# Altium PCB Core.PcbDoc (part 4 of 4)
Units mil, origin at the board's own origin, x right, y up, seen from the top; angles counter-clockwise.
Board outline 3055.22 x 2665.85 mil, 4 copper layers (Top Layer, Layer 1, Layer 2, Bottom Layer), stack 61.583 mil thick; 290 components, 231 nets, 1079 pads, 581 vias.
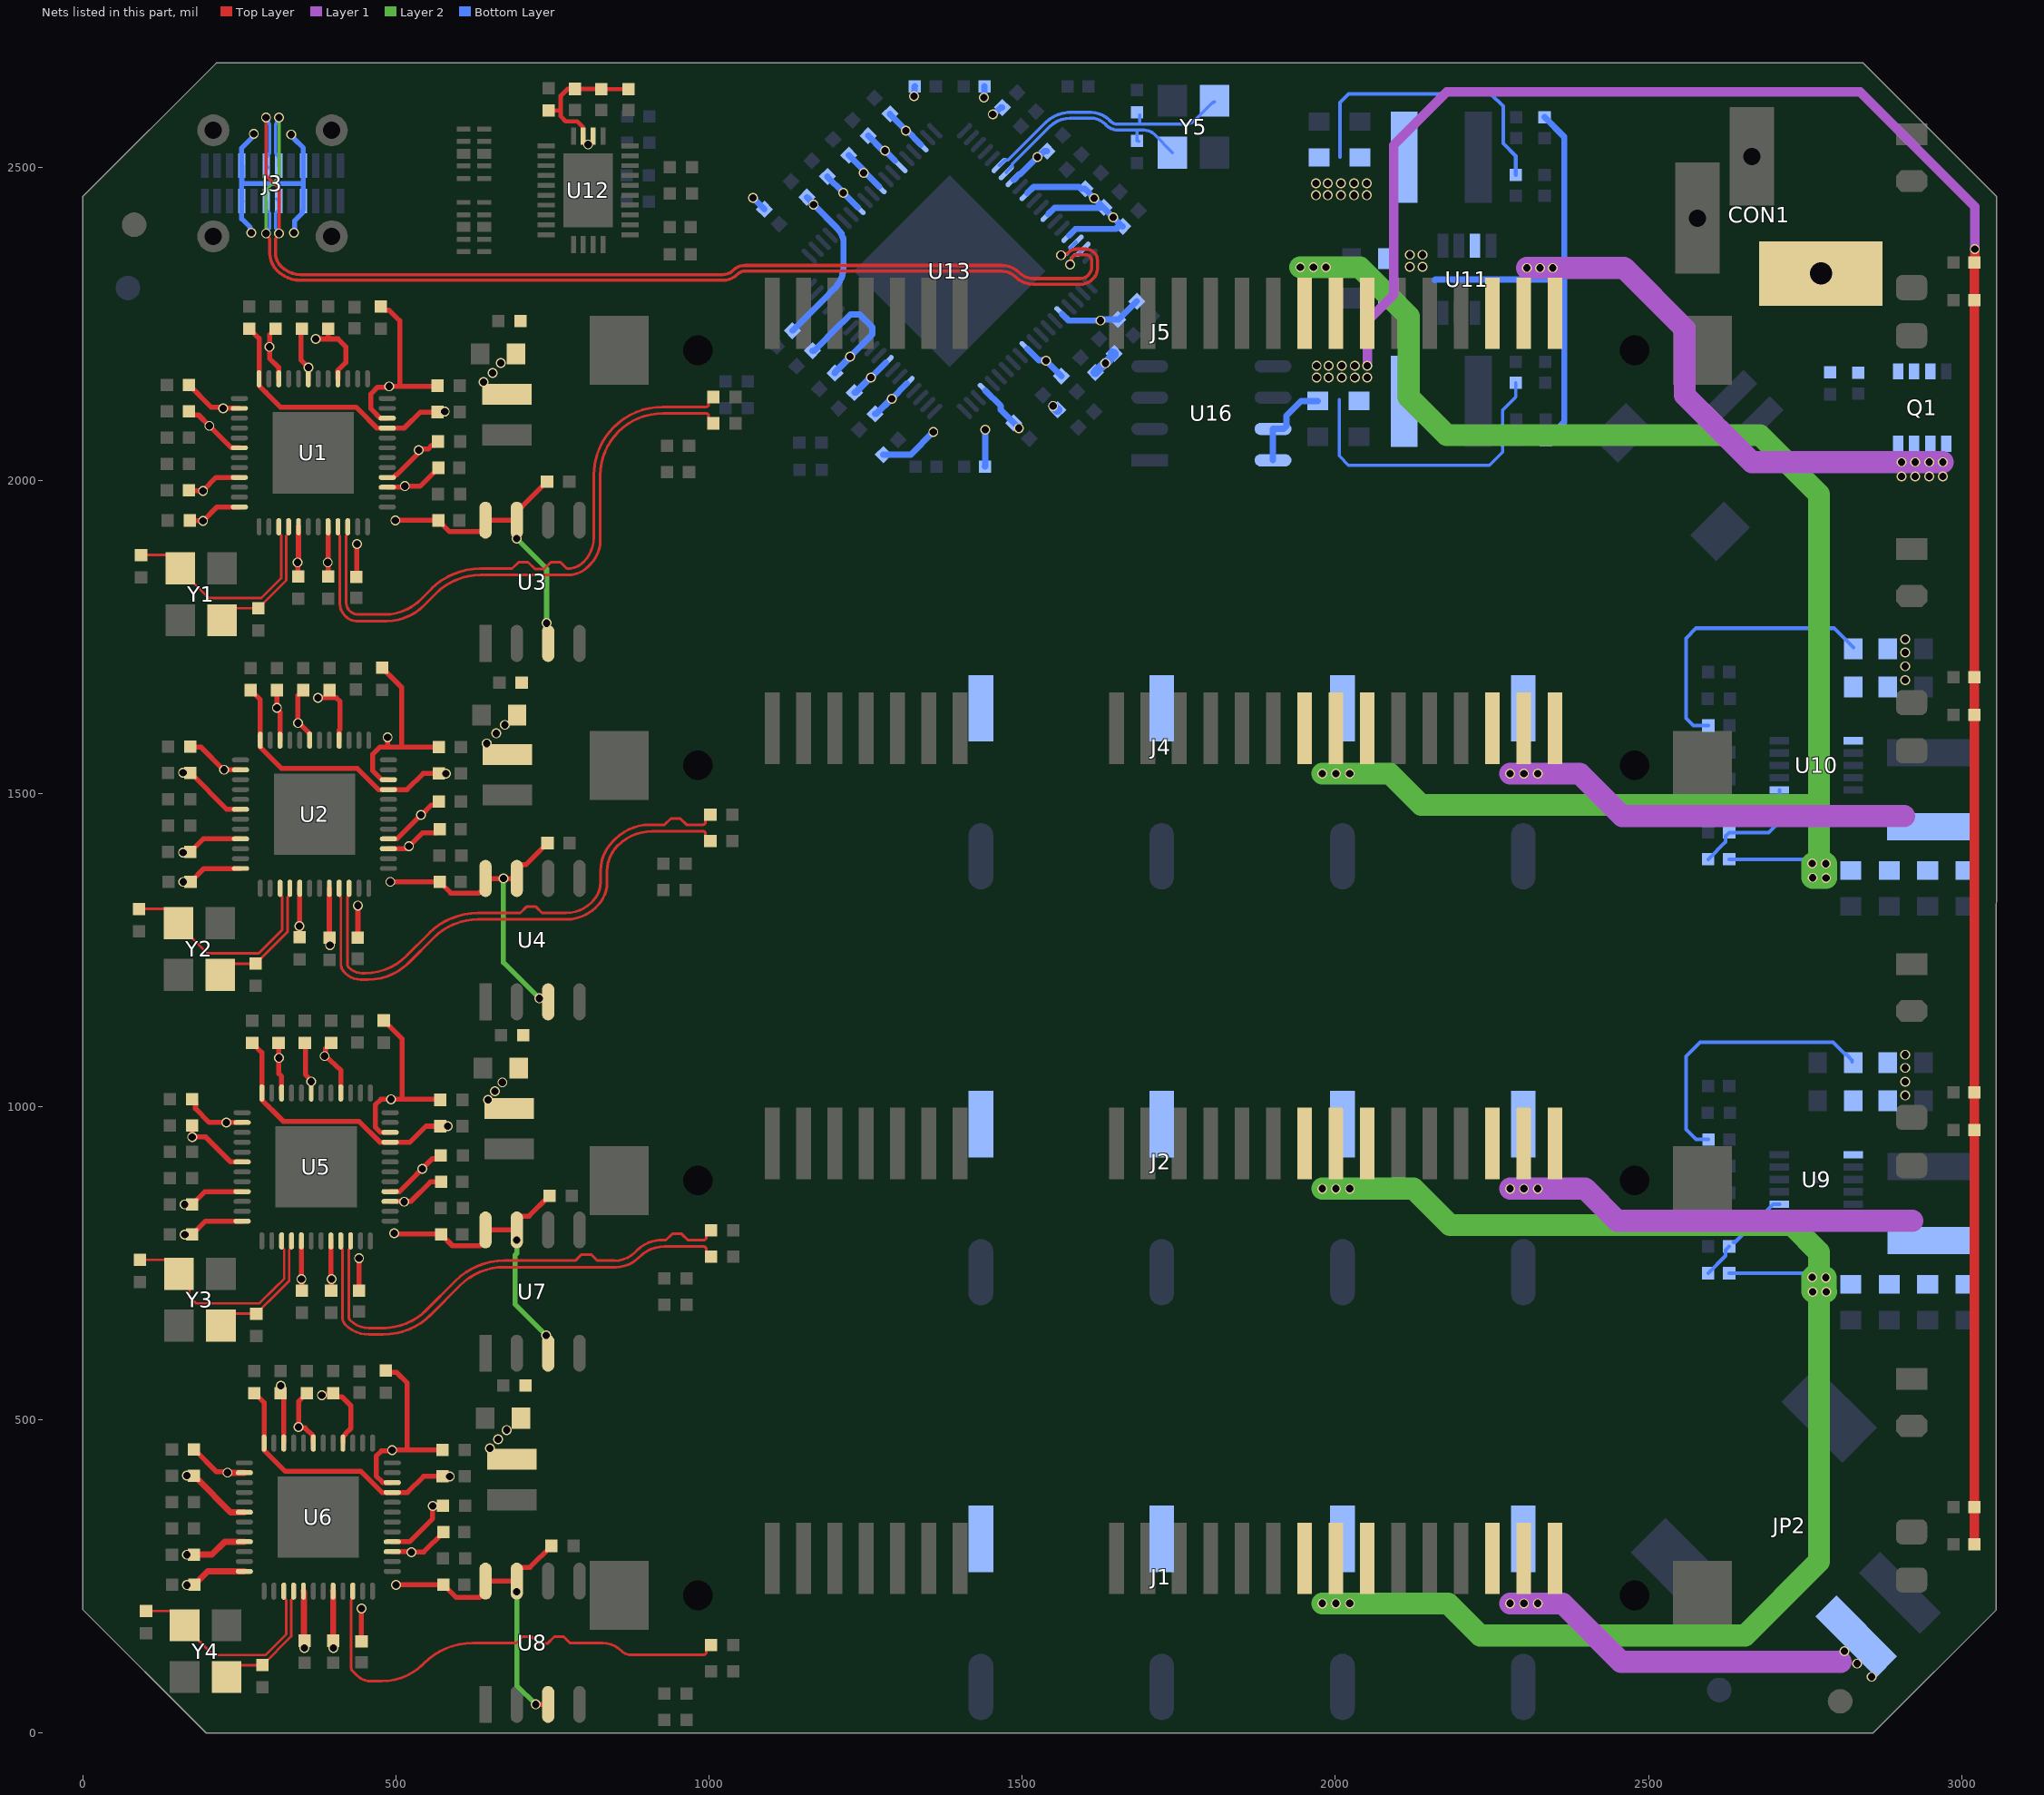
[diagram p6: the nets of this part, all layers, seen from the top]

## Via types
v1: diameter 15.75, hole 11.81, Top Layer to Bottom Layer, tented both sides, 581 vias

## Nets (pads, with @x,y where several pads share a name; then routed paths per layer and width w, separated by ;. In a path a pad name is that pad's centre, name@x,y a point inside that pad or via, vN(x,y) a via of type N, cw(c..) or ccw(c..) an arc to the next point about the centre after c; other vN are vias at no path point) (continued)
TX1_P: C1.2 U6.34 | length 758.8
  Top Layer w4.29: 430.77,99.12 cw(c436.58,104.9) 428.39,104.9 428.39,211.42 cw(c433.05,211.42) 429.75,214.71 ccw(c426.46,218.01) 431.12,218.01 U6.34@431.12,226.89 ; 430.79,99.1 437.64,92.25 ccw(c459.98,114.59) 459.98,83 477.18,83 ccw(c477.18,176.71) 543.42,110.42 ; 540.43,107.43 543.42,110.42 ; C1.2@997.55,135.27 ccw(c1002.33,130.51) 995.59,130.51 995.59,129.49 cw(c991.3,129.49) 994.33,126.46 cw(c991.3,129.49) 991.3,125.2 875.5,125.2 cw(c875.5,147.29) 859.89,131.66 ccw(c830.12,101.92) 830.12,144 801.46,144 777.86,144 767.86,154 752.86,154 742.43,143.57 727.43,143.57 717,154 702,154 692,144 677,144 622.65,144 ccw(c622.65,33.8) 544.82,111.82 ccw(c622.65,33.8) 544.72,111.72 543.42,110.42 ; C1.2@997.56,135.28 C1.2@1003.28,141
TX2_N: C4.2 U5.33 | length 778.1
  Top Layer w4.29: U5.33@411.91,785.89 411.91,775.08 414.64,772.35 414.64,663.78 ccw(c431.52,663.78) 419.56,651.87 ; 419.59,651.84 419.69,651.73 ccw(c456.41,688.45) 456.41,636.53 479.72,636.53 ccw(c479.72,743.62) 555.45,667.89 602.26,714.71 cw(c672.97,644) 672.97,744 851.15,744 ccw(c851.15,795.67) 887.67,759.12 ; 887.69,759.13 888.98,760.43 cw(c928.64,720.77) 928.64,776.85 991.3,776.86 cw(c991.3,772.56) 994.33,775.6 cw(c991.3,772.56) 995.59,772.56 995.59,771.52 ccw(c1002.4,771.52) 997.58,766.71 C4.2@1003.28,761
TX2_P: C2.2 U5.34 | length 783
  Top Layer w4.29: 426.88,659.1 cw(c431.67,663.84) 424.93,663.84 424.93,772.35 427.66,775.08 U5.34@427.66,785.89 ; 426.93,659.05 ccw(c456.49,688.66) 456.49,646.82 479.57,646.82 ; 483.83,646.82 479.57,646.82 ; C2.2@1003.28,803 997.58,797.29 ccw(c1002.4,792.48) 995.59,792.48 995.59,791.44 cw(c991.3,791.44) 994.33,788.4 cw(c991.3,791.44) 991.3,787.14 966.04,787.14 956.04,797.14 941.04,797.14 931.04,787.14 924.38,787.14 ccw(c924.38,731.06) 916.07,786.53 ccw(c924.38,731.06) 884.72,770.72 881.7,767.7 cw(c849.32,800.09) 849.32,754.29 841,754.29 821.5,754.29 811.5,764.29 796.5,764.29 786.5,754.29 749,754.29 672.94,754.29 ccw(c672.94,644.09) 595.11,722.11 ccw(c672.94,644.09) 595.01,722.01 548.28,675.28 cw(c479.57,743.98) 479.57,646.82
TX3_N: C11.2 U2.33 | length 849.3
  Top Layer w4.29: U2.33@409.37,1348.89 409.37,1340.01 ccw(c414.03,1340.01) 410.73,1336.71 cw(c407.44,1333.42) 412.1,1333.42 412.1,1227.86 ccw(c430.49,1227.86) 417.45,1214.89 ccw(c430.49,1227.86) 417.49,1214.85 419.17,1213.17 ccw(c443.72,1237.72) 443.72,1203 455,1203 ccw(c455,1296.07) 520.81,1230.26 560.26,1269.71 cw(c630.97,1199) 630.97,1299 771.79,1299 ccw(c771.79,1366.23) 819.33,1318.69 821.66,1321.02 ccw(c784.33,1358.35) 837.12,1358.35 837.12,1376.05 cw(c894.91,1376.05) 854.05,1416.9 cw(c909.46,1361.49) 854.09,1416.94 cw(c909.46,1361.49) 909.46,1439.86 990.01,1439.86 cw(c990.01,1435.56) 993.05,1438.6 cw(c990.01,1435.56) 994.3,1435.56 994.3,1434.52 ccw(c1001.12,1434.52) 996.29,1429.71 C11.2@1002,1424
TX3_P: C9.2 U2.34 | length 849.5
  Top Layer w4.29: 424.77,1222.12 cw(c430.58,1227.9) 422.39,1227.9 422.39,1333.42 cw(c427.05,1333.42) 423.75,1336.7 ccw(c420.46,1340.01) 425.12,1340.01 U2.34@425.12,1348.89 ; 424.79,1222.1 424.86,1222.04 ccw(c446.01,1243.25) 446.01,1213.29 450.74,1213.29 ccw(c450.74,1306.36) 516.53,1240.53 553.01,1277.01 cw(c630.94,1199.09) 553.11,1277.11 cw(c630.94,1199.09) 630.94,1309.29 663,1309.29 698.37,1309.29 708.37,1319.29 723.37,1319.29 733.37,1309.29 748.37,1309.29 771.75,1309.29 ccw(c771.75,1366.34) 812.09,1326 814.34,1328.25 ccw(c784.17,1358.41) 826.83,1358.41 826.83,1376.09 cw(c894.81,1376.09) 826.83,1376.2 cw(c894.81,1376.09) 846.68,1424.09 cw(c894.81,1376.09) 846.74,1424.15 849.79,1427.19 cw(c905.2,1371.78) 849.82,1427.23 cw(c905.2,1371.78) 905.2,1450.14 929,1450.14 939,1460.14 954,1460.14 964,1450.14 979,1450.14 990.01,1450.14 ccw(c990.01,1454.44) 993.05,1451.4 ccw(c990.01,1454.44) 994.3,1454.44 994.3,1455.48 cw(c1001.12,1455.48) 996.29,1460.29 C9.2@1002,1466
TX4_N: C12.2 U1.33 | length 959.6
  Top Layer w4.29: U1.33@407.37,1925.89 407.37,1917.01 ccw(c412.03,1917.01) 408.73,1913.71 410.35,1912.1 410.35,1803.39 ccw(c437.41,1803.39) 421.51,1781.49 ccw(c436.06,1796.04) 436.06,1775.46 485.72,1775.46 ccw(c485.72,1858.26) 544.22,1799.67 ccw(c485.72,1858.26) 544.26,1799.71 563.97,1819.42 cw(c634.68,1748.71) 634.68,1848.71 774.14,1848.71 ccw(c774.14,1894.86) 806.78,1862.23 809.82,1865.27 ccw(c769.95,1905.07) 826.29,1905.07 826.29,2007.97 cw(c924.71,2007.97) 855.12,2077.57 cw(c925.83,2006.86) 925.83,2106.86 995.01,2106.86 cw(c995.01,2102.56) 998.05,2105.6 cw(c995.01,2102.56) 999.3,2102.56 999.3,2101.52 ccw(c1006.12,2101.52) 1001.29,2096.71 C12.2@1007,2091
TX4_P: C10.2 U1.34 | length 959.2
  Top Layer w4.29: U1.34@423.12,1925.89 423.12,1917.01 cw(c418.46,1917.01) 421.75,1913.71 ccw(c424.45,1911.01) 420.64,1911.01 420.64,1804.19 ccw(c438.19,1804.19) 425.78,1791.78 ccw(c440.33,1806.33) 440.33,1785.75 481.45,1785.75 ccw(c481.45,1868.55) 539.96,1809.96 ccw(c481.45,1868.55) 540,1810 556.72,1826.72 cw(c634.65,1748.8) 556.82,1826.82 cw(c634.65,1748.8) 634.37,1859 cw(c634.66,1748.8) 634.65,1859 685.53,1859 695.89,1869.37 710.89,1869.37 721.26,1859 721.69,1858.57 736.69,1858.57 737.12,1859 747.49,1869.37 762.49,1869.37 772.86,1859 774.1,1859 ccw(c774.1,1894.96) 788.91,1862.19 ccw(c774.1,1894.96) 799.53,1869.53 ccw(c759.66,1909.34) 816,1909.34 816,2008.01 cw(c924.62,2008.01) 816,2008.16 cw(c924.62,2008.01) 847.75,2084.75 cw(c924.62,2008.01) 847.81,2084.81 848,2085 cw(c925.6,2007.4) 925.6,2117.14 995.01,2117.14 ccw(c995.01,2121.44) 998.05,2118.4 ccw(c995.01,2121.44) 999.3,2121.44 999.3,2122.48 cw(c1006.12,2122.48) 1001.29,2127.29 C10.2@1007,2133
USBD_N: J3.A7 J3.B7 U13.56 | length 1811.7
  Top Layer w5.15: v1(292.63,2579) 292.63,2486.37 313.38,2465.62 v1@313.38,2394.38 ; v1(313.38,2394) 313.38,2391.48 307.58,2385.68 307.58,2363 ccw(c337.95,2363) 316.48,2341.52 ccw(c347.99,2373.04) 347.99,2328.47 1022.18,2328.47 ccw(c1022.18,2351.82) 1038.69,2335.31 cw(c1057.26,2316.74) 1057.26,2343 1467.15,2343 cw(c1467.15,2302.31) 1495.92,2331.08 ; 1495.93,2331.07 ccw(c1517.85,2353.01) 1517.85,2322 1592.93,2322 ccw(c1592.93,2339.07) 1605,2327 ccw(c1590.84,2341.16) 1610.87,2341.16 1610.87,2350.91 ccw(c1601.82,2350.91) 1608.22,2357.31 ccw(c1602,2351.1) 1607.62,2357.85 ccw(c1602,2351.1) 1602,2359.89 1587.09,2359.89 ccw(c1587.09,2350.92) 1580.75,2357.26 ccw(c1587.09,2350.92) 1580.32,2356.8 ccw(c1587.09,2350.92) 1578.12,2350.92 1578.12,2348.95 cw(c1572.05,2348.95) v1(1576.34,2344.66) v1@1574.57,2342.88
  Bottom Layer w5.15: v1(292.63,2579) ccw(c298.7,2579) 294.41,2574.7 cw(c284.7,2565) 298.42,2565 298.43,2525.11 cw(c289.44,2525.11) 295.8,2518.77 ccw(c302.15,2512.4) 293.16,2512.4 J3.A7@293.16,2502.34 J3.A7@296.43,2499.08 ; J3.B7@309.52,2448.99 J3.B7@312.85,2445.66 312.85,2431.88 307.58,2426.61 307.58,2402.32 313.38,2396.52 v1(313.38,2394) ; v1(1576.34,2344.66) 1578.12,2346.43 1578.12,2354.64 1583.41,2359.92 1588.11,2359.92 U13.56@1596.98,2368.79
USBD_P: J3.A6 J3.B6 U13.55 | length 1853.5
  Top Layer w5.15: v1(292.63,2394) 292.63,2391.48 298.43,2385.68 298.43,2362.96 ccw(c337.85,2362.96) 309.93,2335.13 ccw(c337.85,2362.96) 309.98,2335.08 310.08,2334.98 ccw(c347.99,2373.04) 347.89,2319.32 ccw(c347.99,2373.04) 347.99,2319.32 1022.27,2319.32 ccw(c1022.27,2351.61) 1045.1,2328.78 cw(c1057.34,2316.54) 1057.34,2333.85 1467.03,2333.85 cw(c1467.03,2302.03) 1489.53,2324.53 ; 1489.55,2324.51 ccw(c1517.73,2352.73) 1517.73,2312.85 1593,2312.85 ccw(c1593,2338.9) 1611.42,2320.48 1614.15,2323.21 ; v1@1559.89,2357.55 v1(1561.67,2359.33) cw(c1565.97,2355.03) 1565.97,2361.11 1566.05,2361.11 ccw(c1566.05,2374.64) 1575.62,2365.07 cw(c1585.19,2355.5) 1585.19,2369.04 1602.06,2369.04 cw(c1602.06,2351.25) 1614.64,2363.83 1615.21,2363.26 cw(c1603.6,2351.65) 1620.02,2351.65 1620.02,2337.37 cw(c1599.99,2337.37) 1614.17,2323.23
  Layer 2 w5.15: v1(292.63,2394) 292.63,2463.63 313.37,2484.37 v1(313.37,2579)
  Bottom Layer w5.15: v1(292.63,2394) 292.63,2396.52 298.43,2402.32 298.43,2426.61 293.16,2431.88 J3.B6@293.16,2445.66 ; J3.A6@312.84,2502.34 312.84,2512.4 ccw(c303.85,2512.4) 310.22,2518.75 cw(c316.56,2525.11) 307.57,2525.11 307.57,2565 cw(c321.3,2565) 311.58,2574.69 ccw(c307.3,2579) v1(313.37,2579) ; v1(1561.67,2359.33) 1563.45,2361.11 1571.65,2361.11 1576.94,2366.39 1576.94,2371.09 U13.55@1585.81,2379.96
VBUS: C41.2 C42.2 C46.2 C47.2 C83.2 C84.2 C88.2 C89.2 C123.2 C124.2 C129.2 J3.A4 J3.A9 J3.B4 J3.B9 R30.1 R31.1 R38.1 R39.1 R45.2 U1.12 U1.45 U2.12 U2.45 U5.12 U5.45 U6.12 U6.45 U11.7 U12.26 U12.27 | length 3189.3
  Top Layer w2: C83.2@570.83,969 v1(582.54,969)
  Top Layer w7: C129.2@744,2590.28 763.13,2590.28 ; 763,2608 763,2613.73 774,2624.73 R45.2@786,2624.73 786.13,2624.6 R39.1@826.46,2624.6 ; 763.13,2608 763.13,2590.28 ; U12.27@799,2539.9 801.27,2537.63 805.21,2537.63 v1(806.88,2535.96) ; U12.27@799.12,2549.62 798.68,2550.06 798.68,2563.55 789.23,2573 771,2573 763.13,2580.87 763.13,2590.28 ; R39.1@823,2621 826.46,2624.46 R39.1@828,2624.46 R38.1@870.54,2624.46 ; R38.1@871,2624.46 R38.1@870.54,2624.46 ; R38.1@872,2623 R38.1@870.54,2624.46
  Top Layer w8: C41.2@266,2242 281.39,2226.62 U1.12@281.39,2162.11 281.39,2151.13 292.19,2140.33 292.35,2140.33 315.72,2116.96 436.27,2116.96 440.72,2112.51 440.78,2112.51 469.92,2083.37 U1.45@486.11,2083.37 513.37,2083.37 539,2109 C42.2@566.28,2109 566.63,2109.35 577.65,2109.35 v1(578,2109.7) ; C46.2@268,1665 283.39,1649.62 U2.12@283.39,1585.11 283.39,1573.93 317.35,1539.96 438.27,1539.96 471.87,1506.37 U2.45@488.11,1506.37 517.62,1506.37 543.25,1532 C47.2@568.28,1532 v1(580,1532) ; C84.2@270.54,1102 285.93,1086.62 U5.12@285.93,1022.11 285.93,1011.13 296.71,1000.35 ; C88.2@271.86,540.86 C88.2@274,543 289.39,527.62 U6.12@289.39,463.11 289.39,452.06 323.48,417.96 444.27,417.96 477.8,384.43 494.05,384.43 U6.45@494.11,384.37 518.37,384.37 544,410 C89.2@574.28,410 v1(586,410) ; 296.75,1000.35 304.87,992.23 ; 304.87,992.19 320.1,976.96 440.82,976.96 474.35,943.43 490.59,943.43 U5.45@490.65,943.37 522.42,943.37 548.05,969 C83.2@570.83,969
  Bottom Layer w8: v1(269,2395) 267.52,2396.48 267.52,2403.73 253.79,2417.46 J3.B4@253.79,2445.66 J3.B4@253.79,2445.66 253.79,2445.76 J3.A9@253.79,2502.34 ; v1(273,2553) 271.52,2551.52 271.52,2548.27 253.79,2530.54 J3.A9@253.79,2502.34 ; v1(333,2552) 333,2549.9 337.48,2545.42 337.48,2545.27 352.21,2530.54 J3.A4@352.21,2502.34 J3.B9@352.21,2445.66 352.21,2431.88 350.3,2429.97 350.3,2426.4 338.48,2414.58 338.48,2396.48 v1(337,2395) ; 351.53,2473.99 254.04,2473.99 253.84,2474.19 J3.A9@253.79,2502.34 J3.A9@253.79,2502.34
  Bottom Layer w10: 2159,2320 2159.63,2320.63 2365.5,2320.63 ; R30.1@2334,2579.73 2365.5,2548.23 2365.5,2320.63 ; R31.1@2336,2063.54 2365.5,2093.04 2365.5,2320.63
  other v1: 2119,2341 2139,2341 2119,2360 2139,2360
VCC1V0: C125.2 C126.2 C149.2 C150.2 C151.2 C152.2 C153.2 C154.2 C155.2 C156.2 C157.2 C158.2 C159.2 C160.2 L7.1 R34.1 U13.5 U13.8 U13.11 U13.14 U13.27 U13.30 U13.33 U13.36 U13.48 U13.51 U13.54 U13.67 | length 1658
  Bottom Layer w6: 2007.25,2516.19 2007.25,2603.25 2021,2617 2248,2617 2268,2597 2268,2537.68 2288,2517.68 R34.1@2288,2487.46
  Bottom Layer w10: C153.2@1165,2207 1167.9,2207 1208.72,2247.81 U13.14@1215.57,2254.66 1225.68,2264.78 1240.45,2264.78 1260.76,2244.47 1260.76,2232.96 U13.11@1249.01,2221.22 v1(1225.01,2197.21) ; C152.2@1189,2485 1189,2484.5 1214,2459.5 v1(1214,2459) 1214.23,2459 1237.61,2435.61 U13.27@1237.84,2435.61 ; C154.2@1200.5,2171 C154.2@1201,2171 C154.2@1201,2172.1 ; C150.2@1223,2519 1245.9,2496.1 1245.9,2492.1 v1(1247,2491) ; C149.2@1232,2140 C149.2@1233.27,2140 ; v1@1248.1,2492.1 U13.30@1271.22,2468.99 ; C151.2@1254,2550 1276.9,2527.1 1279.9,2527.1 v1(1281,2526) ; C157.2@1265,2106 C157.2@1266.15,2106 ; v1(1281,2526) U13.33@1297.04,2510.01 ; U13.8@1282.39,2187.84 v1(1258.47,2163.92) ; C158.2@1289,2585 1289,2584 1314,2559 v1(1314,2558) ; v1@1313.96,2559.96 1338.04,2535.89 U13.36@1338.04,2535.81 ; U13.5@1315.76,2154.47 v1(1291.53,2130.23) ; U13.67@1507.89,2210.11 1526.48,2191.52 1537.48,2191.52 C156.2@1562.47,2166.53 ; U13.48@1507.89,2457.89 1518.07,2468.07 1591.03,2468.07 1593.62,2465.47 1600,2465.47 1615,2450.47 v1(1615,2450) C155.2@1629.53,2435.47 ; U13.51@1541.26,2424.51 1551.75,2435 1623.15,2435 1623.62,2435.47 C155.2@1629.53,2435.47 ; U13.54@1574.71,2391.06 1584.89,2401.25 1649.4,2401.25 C159.2@1653.62,2405.47 ; C159.2@1660.47,2405.47 1660,2405.47 1645.47,2420 v1(1645,2420) C155.2@1629.53,2435.47 ; C154.2@1201,2172.1 1201,2173.2 v1(1225.01,2197.21) ; C154.2@1201,2172.1 1225.01,2196.11 v1(1225.01,2197.21) ; C149.2@1233.27,2140 1234.55,2140 v1(1258.47,2163.92) ; C149.2@1233.27,2140 1257.19,2163.92 v1(1258.47,2163.92) ; C157.2@1266.15,2106 1267.3,2106 v1(1291.53,2130.23) ; C157.2@1266.15,2106 1290.38,2130.23 v1(1291.53,2130.23)
  other v1: 1538,2191 1969,2455 1988,2455 2009,2455 2030,2455 2050,2455 1969,2474 1988,2474 2009,2474 2030,2474 2050,2474
VCC1V2-A: C19.2 C20.2 C25.2 C26.2 C27.2 C28.2 C29.2 C30.2 C31.2 C32.2 L1.2 U1.4 U1.10 U1.18 U1.21 U1.24 U1.29 U1.32 U1.40 | length 755.6
  Top Layer w8: C28.2@169.72,1984 170.22,1983.5 191.5,1983.5 v1(192,1983) ; C30.2@169.72,2110 175.4,2104.31 184.69,2104.31 v1(202,2087) 237.13,2051.87 U1.18@249.89,2051.87 ; C25.2@170.72,1936 171.22,1935.5 191.5,1935.5 v1(192,1935) 214.39,1957.39 U1.24@249.89,1957.39 ; v1@192,1984 212.63,2004.63 U1.21@249.89,2004.63 ; C29.2@308,2242 298.26,2232.26 v1(298.26,2213) 298.26,2194.74 312.88,2180.12 U1.10@312.88,2162.11 ; v1(343,1869) 343.5,1868.5 343.5,1848.22 C26.2@344,1847.72 ; v1@344.38,1868 U1.29@344.38,1925.89 ; v1(372.09,2225.65) 392,2225.65 ; v1(391,1869) 391.5,1868.5 391.5,1847.22 C31.2@392,1846.72 ; v1@391.62,1868 U1.32@391.62,1925.89 ; C27.2@392,2242 392,2225.65 ; U1.4@407.37,2162.11 407.37,2175.37 420,2188 420,2213.18 407.53,2225.65 392,2225.65 ; U1.40@495.89,2004.69 499.64,2008.44 500.9,2008.44 534.74,2042.28 534.74,2046.86 v1(536.22,2048.35) ; v1@536,2049 536.83,2049.83 551.23,2049.83 557.56,2056.16 561.16,2056.16 C32.2@567,2062
  other v1: 639.87,2157.08 654.38,2171.18 667.52,2187.12
VCC1V2-B: C21.2 C22.2 C33.2 C34.2 C35.2 C36.2 C37.2 C38.2 C39.2 C40.2 L2.2 U2.4 U2.10 U2.18 U2.21 U2.24 U2.29 U2.32 U2.40 | length 762.8
  Top Layer w8: v1(160,1406) 160.5,1406.5 171.22,1406.5 C36.2@171.72,1407 192.35,1427.63 U2.21@251.89,1427.63 ; v1(160.28,1359) C33.2@172,1359 193.39,1380.39 U2.24@251.89,1380.39 ; C35.2@171.72,1533 229.84,1474.87 U2.18@251.89,1474.87 ; C34.2@310,1665 310,1634.9 314.88,1630.02 U2.10@314.88,1585.11 ; C40.2@346,1270.72 345.91,1270.81 345.91,1288.15 v1(345.82,1288.24) 346.31,1288.74 346.31,1348.83 U2.29@346.38,1348.89 ; v1(375.54,1652.94) 394,1652.94 ; C38.2@393.62,1270.09 U2.32@393.62,1348.89 ; C38.2@394,1269.72 394.32,1269.39 394.32,1258.32 v1(394.65,1258) ; C39.2@394,1665 394,1652.94 ; U2.4@409.37,1585.11 409.37,1601.1 410.8,1602.53 410.8,1646.82 404.68,1652.94 394,1652.94 ; U2.40@497.89,1427.69 501.65,1427.69 v1(539.95,1466) ; v1@541,1466 556.16,1481.16 562.44,1481.16 C37.2@568.28,1487
  other v1: 160,1533 645,1580 660,1596 673.86,1609.67 310,1637
VCC1V2-C: C61.2 C62.2 C67.2 C68.2 C69.2 C70.2 C71.2 C72.2 C73.2 C74.2 L3.2 U5.4 U5.10 U5.18 U5.21 U5.24 U5.29 U5.32 U5.40 | length 768
  Top Layer w8: v1(162.54,844) C67.2@174.26,844 194.89,864.63 U5.21@254.43,864.63 ; v1(162.83,796) C73.2@174.54,796 195.93,817.39 U5.24@254.43,817.39 ; C69.2@174.26,970 174.63,969.63 v1(174.63,951.72) ; v1@174.63,947.63 v1(174.63,951.72) ; U5.18@254.43,911.87 236.13,911.87 196.28,951.72 v1(174.63,951.72) ; C71.2@312.54,1102 312.77,1101.77 312.77,1078.23 v1(313,1078) 313,1053 317.43,1048.57 U5.10@317.43,1022.11 ; U5.29@348.92,785.89 348.98,785.83 v1@348.98,723.91 ; v1(349,725) 349.54,724.46 349.54,707.26 C74.2@350.09,706.72 ; v1(386,1081) v1@386.9,1081 ; U5.32@396.17,785.89 396.23,785.83 v1@396.23,724.54 ; C68.2@396.54,706.72 396.77,706.94 396.77,724.77 v1(397,725) ; C72.2@396.54,1102 387.48,1092.94 387.48,1081.58 v1@386.9,1081 ; U5.4@411.98,1031.89 411.98,1036.99 412.31,1037.33 412.31,1058.14 395.17,1073.93 388.1,1081 v1@386.9,1081 ; U5.40@490.65,864.63 505.63,864.63 558.4,917.4 566.94,917.4 C70.2@571.54,922 565.7,916.16 559.64,916.16
  other v1: 542,901 647,1011 658,1025 670,1039
VCC1V2-D: C63.2 C64.2 C75.2 C76.2 C77.2 C78.2 C79.2 C80.2 C81.2 C82.2 L4.2 U6.4 U6.10 U6.18 U6.21 U6.24 U6.29 U6.32 U6.40 | length 830.6
  Top Layer w8: v1(316,554.72) C78.2@316,543 320.88,538.12 U6.10@320.88,463.11 ; v1(381.72,539.47) 383.2,540.96 397.21,540.96 C77.2@399.63,543.37 ; C77.2@400,543 405.84,537.16 413.52,537.16 428,522.68 428,486.72 419.18,477.9 419.18,476.64 415.37,472.83 U6.4@415.37,463.11 ; U6.40@494.11,305.63 521.63,305.63 558.54,342.54 v1(558.54,362.73) 558.68,362.86 574.86,362.86 C75.2@575,363
  Top Layer w10: v1(166,285) C76.2@177.72,285 206.05,285 226.68,305.63 U6.21@257.89,305.63 ; v1(166,411.15) 177.56,411.15 182.56,406.16 235.84,352.87 U6.18@257.89,352.87 ; v1(166.28,236.5) 166.53,236.75 177.75,236.75 199.39,258.39 U6.24@257.89,258.39 ; U6.29@352.38,226.89 353.19,226.08 353.19,148.53 C79.2@354,147.72 v1(354,136) ; U6.32@399.62,226.89 399.81,226.7 399.81,147.9 C80.2@400,147.72 v1(400,136)
  other v1: 650,455 663,469 677,484
VCC3V3: C127.2 C128.2 C144.2 C145.2 C146.2 C147.2 C148.2 L8.1 R35.1 R40.2 R41.2 R42.2 R43.2 R47.2 R50.2 R52.2 R54.2 R55.2 R56.1 R57.1 R58.1 R59.1 R60.1 R61.1 R62.1 R63.1 R64.2 U13.17 U13.24 U13.46 U13.62 U13.73 U16.7 U16.8 | length 5026.2
  Top Layer w15: R63.1@3020.23,301.62 R62.1@3020.23,361 R61.1@3020.23,963.12 R60.1@3020.23,1023 R59.1@3020.23,1625.62 R58.1@3020.23,1685.5 R57.1@3020.23,2287.82 R56.1@3020.23,2347.8 3020.86,2348.43 3020.86,2368.86 v1(3021,2369)
  Layer 1 w15: v1(2051,2183) 2051,2254 2093,2296 2093,2535 2178,2620 2838,2620 3021,2437 v1(3021,2369)
  Bottom Layer w5: 2006,2128.67 2006,2075.78 2006.1,2075.68 2006.1,2062.95 2006,2062.85 2006,2039 2021,2024 2246,2024 2259.5,2037.5 2259.69,2037.5 2267,2044.81 2267,2112 2288,2133 R35.1@2288,2155.54
  Bottom Layer w10: v1(1070,2451) R55.2@1088.34,2432.66 ; C147.2@1133,2239 1133.08,2239 U13.17@1182.11,2288.04 ; C146.2@1156,2452 1165.93,2442.07 cw(c1163.72,2439.85) v1(1166.85,2439.85) U13.24@1204.47,2402.24 cw(c1180.04,2377.81) U13.24@1204.47,2402.24 cw(c1180.04,2377.81) 1211.2,2392.71 1213.32,2388.29 cw(c1201.64,2382.71) 1214.58,2382.71 1214.58,2341 cw(c1164.92,2341) 1200.04,2305.88 U13.17@1182.19,2288.04 ; R47.2@1278.17,2041.17 1322.17,2041.17 v1(1358,2077) ; v1(1327,2613) 1327.77,2613.77 1327.77,2628.23 R52.2@1328.54,2629 ; v1(1439,2611) 1439.37,2611.37 1439.37,2628.63 R54.2@1439.73,2629 ; R43.2@1440.46,2022 1440.73,2022.27 1440.73,2080.73 v1(1441,2081) ; U13.73@1441.06,2143.29 1465.48,2118.88 1465.48,2112.52 C148.2@1486.47,2091.53 v1(1494.76,2083.24) ; v1(1453,2584) 1454.56,2584 1465.72,2595.17 R50.2@1468.17,2595.17 ; U13.46@1485.61,2480.16 1487.11,2480.16 1495.47,2488.51 1496.51,2488.51 v1(1524,2516) 1525.56,2516 1535.03,2525.47 C144.2@1539.47,2525.47 ; U13.62@1563.53,2265.76 1574.3,2255 1626.67,2255 1628.2,2256.53 C145.2@1652.47,2256.53 ccw(c1652.47,2259.72) 1654.73,2257.46 R64.2@1682.94,2285.67 ; U16.8@1900.43,2032 U16.7@1900.43,2082 1917.49,2082 1921.96,2086.47 1921.96,2103.54 1944.97,2126.54 C128.2@1972,2126.54
  Bottom Layer w15: v1(1549.27,2118.73) 1549.47,2118.73 1555.87,2112.34 R40.2@1556.66,2112.34 ; R41.2@1616.83,2172.17 v1@1632.33,2187.67 ; v1(1633,2187) 1633,2187.2 1646.66,2200.87 R42.2@1646.66,2202.34 ; R42.2@1644,2202.34 R42.2@1644,2203
  other v1: 1970,2164 1989,2164 2010,2164 2031,2164 2051,2164 1970,2183 1989,2183 2010,2183 2031,2183 1625.12,2255
VCC3V3-A: C23.2 C43.2 C44.2 C45.2 C161.2 R1.1 R3.1 R7.1 U1.7 U1.14 U1.39 U1.46 U3.3 U3.7 U3.8 | length 1156.5
  Top Layer w8: C43.2@168.84,2152.87 205.23,2116.48 222.52,2116.48 224.07,2114.93 249.83,2114.93 U1.14@249.89,2114.87 ; C45.2@350,2242 348.46,2240.47 348.46,2191.93 v1(360.13,2180.27) ; U1.7@360.13,2162.11 v1@360.13,2176.73 ; R7.1@437,1845.73 437.5,1846.23 437.5,1897.76 v1(438,1898.26) ; C23.2@476,2277.43 481.84,2271.59 489.03,2271.59 506,2254.62 506,2150 ; U1.39@486.11,1988.88 486.17,1988.94 510.31,1988.94 512.09,1990.72 v1(514.19,1990.72) ; U1.46@486.11,2099.12 475.13,2099.12 460,2114.25 460,2138 470.52,2148.52 487.52,2148.52 v1(489,2150) 506,2150 ; v1(499,1936) R3.1@567.86,1936 585.7,1918.16 637.6,1918.16 643,1923.56 U3.8@643,1936.43 U3.7@693,1936.43 ; v1@514,1991 514.64,1990.36 538.22,1990.36 R1.1@567.86,2020 ; C44.2@566.28,2151 565.28,2150 506,2150 ; v1(692.61,1907) 692.8,1907.2 692.8,1936.23 U3.7@693,1936.43 ; v1(740.55,1772) 741.78,1770.78 741.78,1740.8 U3.3@743,1739.57 ; C161.2@741.28,1998 701.63,1958.35 698.4,1958.35 693,1952.95 U3.7@693,1936.43
  Layer 2 w8: v1(692.61,1907) 740.55,1859.06 v1(740.55,1772)
  other v1: 224,2115
VCC3V3-B: C24.2 C48.2 C49.2 C50.2 C162.2 R2.1 R4.1 R8.1 U2.7 U2.14 U2.39 U2.46 U4.3 U4.7 U4.8 | length 1186.8
  Top Layer w8: C48.2@172.59,1574.13 188.87,1574.13 225.13,1537.87 v1@225.55,1537.87 ; v1(225.55,1538) 225.62,1537.93 251.83,1537.93 U2.14@251.89,1537.87 ; v1(343.6,1612.55) 343.6,1656.6 C49.2@352,1665 ; v1@345.05,1611.05 347.16,1611.05 362.06,1596.15 U2.7@362.06,1594.89 ; R8.1@439,1269.73 439.25,1269.98 439.25,1321.04 v1(439.5,1321.29) ; C24.2@478,1700.72 508.94,1669.78 508.94,1574 ; v1(486.64,1589.53) 486.64,1574.36 487,1574 ; U2.39@488.11,1411.88 514.65,1411.88 518.64,1415.87 v1(520.74,1415.87) ; U2.46@488.11,1522.12 477.13,1522.12 463,1536.25 463,1562.68 474.32,1574 487,1574 ; v1(491,1359) R4.1@569.86,1359 587.7,1341.16 632.47,1341.16 633.82,1342.5 637.6,1342.5 643,1347.9 U4.8@643,1364.43 v1(671.6,1364.43) U4.7@693,1364.43 693,1380.95 698.4,1386.35 707.35,1386.35 C162.2@742,1421 ; v1@520.28,1415 542.28,1437 559.33,1437 559.49,1437.16 564.01,1437.16 R2.1@569.86,1443 ; C50.2@568.28,1574 508.94,1574 ; v1(729,1173) 737.6,1173 U4.3@743,1167.57 ; 487,1574 508.94,1574
  Layer 2 w8: v1(671.6,1364.43) 671.6,1230.4 v1(729,1173)
VCC3V3-C: C65.2 C85.2 C86.2 C87.2 C163.2 R9.1 R11.1 R15.1 U5.7 U5.14 U5.39 U5.46 U7.3 U7.7 U7.8 | length 1142.5
  Top Layer w8: C87.2@179.96,1006.3 179.96,997.04 202,975 v1(229,975) ; v1@229,974.87 U5.14@254.43,974.87 ; C86.2@354.54,1102 355.55,1101 355.55,1051.49 364.67,1042.37 v1(364.67,1040.27) ; R15.1@441.09,706.73 v1(441.09,758.39) ; C65.2@480.54,1137.72 510,1108.26 510,1012 ; U5.39@490.65,848.88 490.72,848.82 512.78,848.82 v1(513.09,848.51) 513.94,849.35 524.35,849.35 555.15,880.15 572.25,880.15 R9.1@572.4,880 ; U5.46@490.65,959.12 475.63,959.12 467,967.75 467,999.92 467,1003 476,1012 v1(492,1012) 510,1012 ; v1(497,798) 498,797 571.4,797 R11.1@572.4,796 590.24,778.16 634.26,778.16 643,786.9 U7.8@643,803.43 U7.7@693,803.43 ; C163.2@570.83,1011 564.99,1012 510,1012 ; v1(693,787) U7.7@693,803.43 ; v1(740,635) 740,632.9 741.48,631.42 741.48,608.09 U7.3@743,606.57 ; C85.2@745.28,858 712.63,825.35 698.4,825.35 693,819.95 U7.7@693,803.43
  Layer 2 w8: v1(693,787) 693,766.13 690,763.13 690,685 v1(740,635)
VCC3V3-D: C66.2 C90.2 C91.2 C92.2 C164.2 R10.1 R12.1 R16.1 U6.7 U6.14 U6.39 U6.46 U8.3 U8.7 U8.8 | length 1204.7
  Top Layer w8: C91.2@177.72,453 213.23,417.48 229.52,417.48 v1(231,416) ; v1@346,487.45 354.77,487.45 368.13,474.09 U6.7@368.13,463.11 ; v1@346,488 344.46,489.54 344.46,529.46 C92.2@358,543 ; R16.1@445,146.73 v1(445,199.33) ; C66.2@484,578.72 486.87,575.84 501.16,575.84 518,559 518,452 ; U6.39@494.11,289.88 494.17,289.82 523.72,289.82 v1(524.53,289.01) ; U6.46@494.11,400.12 479.09,400.12 468.54,410.67 468.54,442.31 476.75,450.52 492.52,450.52 v1(494,452) 518,452 ; v1(500,237) R12.1@575.86,237 595.86,217 633.67,217 643,226.33 U8.8@643,242.85 U8.7@693,242.85 ; v1@523.48,291.48 525.41,289.55 544.41,289.55 R10.1@575.86,321 ; C90.2@574.28,452 518,452 ; v1(693,226) U8.7@693,242.85 ; v1(723,46) U8.3@743,46 ; C164.2@748.28,299 714.06,264.77 698.4,264.77 693,259.37 U8.7@693,242.85
  Top Layer w10: v1(231,416) 231.07,415.93 257.82,415.93 U6.14@257.89,415.87
  Layer 2 w8: v1(693,226) 693,76 v1(723,46)
  other v1: 344.5,488.93
VCC5V-A: C106.2 C107.2 C108.2 C109.2 E5.1 E6.1 E9.1 E10.1 J1.P7 J1.P8 J1.P9 J2.P7 J2.P8 J2.P9 L5.2 R20.1 | length 2387.3
  Layer 2 w35: v1@1979,207 2001,207 2023,207 2180,207 2231,156 2654,156 2772,274 2772,694.86 ; v1(1979,869.32) v1(2001,869.32) v1(2023,869.32) 2124.68,869.32 2183,811 2729,811 2772,768 2772,738.05 v1(2761.54,727.59) ; v1@2761.54,705.32 v1(2761.54,727.59) ; v1(2762.03,704.83) v1@2783.31,704.83 ; v1(2783.54,704.59) v1@2783.31,704.83 ; v1(2761.54,727.59) 2761.78,727.36 v1(2783.06,727.36) 2783.06,705.08 v1@2783.31,704.83
  Bottom Layer w6: R20.1@2628.79,734.36 2752.15,734.36 2758.91,727.59 v1(2761.54,727.59)
  other v1: 1979,207.32 2001,207.32 2023,207.32
VCC5V-B: C117.2 C118.2 C119.2 C120.2 E1.1 E2.1 J4.P7 J4.P8 J4.P9 J5.P7 J5.P8 J5.P9 L6.2 R26.1 | length 2686.7
  Layer 2 w35: v1(1944,2340) v1(1965,2340) 2039,2340 2117,2262 2117,2133 2178,2072 2678,2072 2772.36,1977.64 2772.36,1482 ; v1(1979,1531.92) v1(2001,1531.92) v1(2023,1531.92) 2087.08,1531.92 2137,1482 2772.36,1482 ; v1@2783.48,1388.12 v1(2783.48,1365.24) 2783.25,1365.48 v1(2761.97,1365.48) 2761.73,1365.72 2761.48,1365.96 v1(2761.48,1388.24) 2761.6,1388.12 2761.72,1388 v1(2783,1388) 2772.36,1398.64 2772.36,1482
  Bottom Layer w6: R26.1@2628.73,1395 2752.09,1395 2758.85,1388.24 v1(2761.48,1388.24)
  other v1: 1985,2340
VCC12V: C102.2 C103.2 C104.2 C105.2 C113.2 C114.2 C115.2 C116.2 E3.1 E4.1 E7.1 E8.1 E11.1 E12.1 J1.P13 J1.P14 J1.P15 J2.P13 J2.P14 J2.P15 J4.P13 J4.P14 J4.P15 J5.P13 J5.P14 J5.P15 JP2.1 Q1.3 R17.1 R24.1 U9.1 U10.1 | length 3643
  Layer 1 w35: v1@2279,207 2363,207 2456,114 2807,114 ; v1(2279,869.32) v1(2301,869.32) v1(2323,869.32) 2398.68,869.32 2450,818 2921,818 ; v1(2279,1531.92) v1(2301,1531.92) v1(2323,1531.92) 2390.08,1531.92 2458,1464 2908,1464 ; v1(2306,2339) v1(2327,2339) v1(2347,2339) 2461,2339 2558,2242 2558,2136 2665,2029 v1(2904,2029) v1(2926,2029) v1(2948,2029) v1(2970,2029)
  Bottom Layer w6: R24.1@2595.52,1608.57 2571.43,1608.57 2560,1620 2560,1747.82 2576.18,1764 2795.97,1764 C114.2@2827,1732.97 ; R17.1@2595.58,947.93 2576.07,947.93 2560.13,963.87 2560.13,1080.61 2582.51,1103 2794.41,1103 2813.33,1084.09 2815.3,1084.09 2825.13,1074.26 C103.2@2825.13,1072.29
  other v1: 2856,90 2833,111 2813,131 2279,207.32 2301,207.32 2323,207.32 2910,1018 2910,1040 2910,1062 2910,1083 2910,1681 2910,1703 2910,1725 2910,1746 2904,2006 2926,2006 2948,2006 2970,2006
VIN: C130.1 CON1.1 Q1.2 R18.1
VSENSE-A: R20.2 R23.1 U9.6 | length 155
  Bottom Layer w6: R20.2@2595.33,734.36 2623.21,762.24 2623.21,771.49 R23.1@2628.79,777.07 ; R23.1@2635.63,783.91 2638.39,783.91 2699.11,844.62 U9.6@2708.95,844.62
VSENSE-B: R26.2 R29.1 U10.6 | length 194.6
  Bottom Layer w6: R26.2@2595.27,1395 2623.15,1422.88 2623.15,1432.13 R29.1@2628.73,1437.71 2691.71,1437.71 2708.95,1454.95 U10.6@2708.95,1505.62
XIN: C143.1 U13.45 Y5.3 | length 338.9
  Bottom Layer w5.15: U13.45@1474.51,2491.26 1474.51,2492 1484.22,2501.71 1484.22,2504.99 1543.62,2564.38 cw(c1576.81,2531.19) 1576.81,2578.13 1609.68,2578.13 cw(c1609.68,2546.15) 1632.3,2568.76 1634.21,2566.85 ccw(c1652.08,2584.54) 1634.27,2566.79 ccw(c1652.08,2584.54) 1634.33,2566.73 ccw(c1652.08,2584.54) 1649.89,2559.49 1650.98,2559.4 1654.95,2559.05 1655.46,2559 ccw(c1655.91,2564.13) 1655.91,2558.98 1695.02,2558.98 cw(c1695.02,2537.07) 1710.51,2552.57 Y5.3@1739.94,2523.13 ; 1683,2556.47 C143.1@1683,2541.72 1685.12,2541.72 C143.1@1685.89,2540.95
XIN-A: C56.1 U1.28 Y1.3 | length 215.7
  Top Layer w4: Y1.3@222.46,1776.66 241.52,1795.72 C56.1@280,1795.72 324.72,1840.44 324.72,1911.09 328.63,1915 U1.28@328.63,1925.89
XIN-B: C58.1 U2.28 Y2.3 | length 207
  Top Layer w4.29: Y2.3@219.46,1210.66 237.24,1228.43 C58.1@276,1228.43 326.87,1279.3 326.87,1334.74 330.63,1338.5 U2.28@330.63,1348.89
XIN-C: C98.1 U5.28 Y3.3 | length 203.9
  Top Layer w4: Y3.3@220.46,650.66 239.52,669.72 C98.1@277,669.72 313.59,706.3 329.67,722.39 329.67,771.77 333.17,775.27 U5.28@333.17,785.89
XIN-D: C100.1 U6.28 Y4.3 | length 204.2
  Top Layer w4: Y4.3@229.46,89.66 248.52,108.72 C100.1@287,108.72 332.94,154.66 332.94,212.77 336.63,216.45 U6.28@336.63,226.89
XOUT: C142.1 U13.44 Y5.1 | length 409.2
  Bottom Layer w5.15: U13.44@1463.34,2502.43 1472.09,2511.19 1477.48,2511.19 1537.15,2570.85 cw(c1576.81,2531.19) 1537.18,2570.89 cw(c1576.81,2531.19) 1573.2,2587.17 1575,2587.28 1609.68,2587.28 cw(c1609.68,2546.15) 1633.06,2579.99 1636.06,2577.93 ; 1636.09,2577.91 1640.77,2573.23 ccw(c1652.08,2584.54) 1652.08,2568.55 1687.53,2568.55 ; C142.1@1687.53,2582.75 1687.53,2568.55 ; 1776.72,2575.65 cw(c1759.53,2592.87) 1759.53,2568.55 1687.53,2568.55 ; 1776.73,2575.67 1803.51,2602.45 cw(c1806.87,2599.09) Y5.1@1806.87,2603.84
XOUT-A: C55.1 U1.27 Y1.1 | length 350.2
  Top Layer w4: C55.1@93,1880.72 134.16,1880.72 Y1.1@155.54,1859.34 155.54,1857.37 200.91,1812 284.97,1812 316.72,1843.75 316.72,1911.77 312.88,1915.61 U1.27@312.88,1925.89
XOUT-B: C57.1 U2.27 Y2.1 | length 342.9
  Top Layer w4.29: C57.1@90,1315.72 131.06,1315.72 152.54,1294.24 152.54,1291.37 198.91,1245 280.84,1245 318.58,1282.74 318.58,1334.74 314.88,1338.44 U2.27@314.88,1348.89
XOUT-C: C97.1 U5.27 Y3.1 | length 349.7
  Top Layer w4: C97.1@91,755.72 131.91,755.72 153.54,734.1 Y3.1@153.54,733.34 170.28,716.59 170.28,696.83 180.76,686.35 282.32,686.35 305.59,709.62 321.67,725.7 321.67,771.77 317.43,776.01 U5.27@317.43,785.89
XOUT-D: C99.1 U6.27 Y4.1 | length 339
  Top Layer w4: C99.1@101,195 140.91,195 162.54,173.38 162.54,170.37 207.91,125 291.97,125 324.94,157.97 324.94,212.77 320.88,216.83 U6.27@320.88,226.89
pads on no net: J1. J1.P1 J1.P2 J1.P3 J1.SH1 J1.SH2 J2. J2.P1 J2.P2 J2.P3 J2.SH1 J2.SH2 J3.A8 J3.B8 J4. J4.P1 J4.P2 J4.P3 J4.SH1 J4.SH2 J5. J5.P1 J5.P2 J5.P3 J5.SH1 J5.SH2 JP1.0 JP2.0 MR1.Mark MR2.Mark MR3.Mark MR4.Mark U1.16 U1.17 U1.25 U1.35 U1.41 U1.48 U2.16 U2.17 U2.25 U2.35 U2.41 U2.48 U5.16 U5.17 U5.25 U5.35 U5.41 U5.48 U6.16 U6.17 U6.25 U6.35 U6.41 U6.48 U12.11 U12.12 U12.14 U12.15 U12.16 U12.22 U13.2 U13.21 U13.39 U13.42 U13.57 U13.58 U13.59 U13.60 U13.61 U13.63 U13.64 U13.76

## Polygon pours and split planes (outlines as drawn)
VBUS on Layer 1 "VBUS_L02_P025" (solid, remove dead copper, pour order 25): 197.1,0.25 0.25,197.1 0.31,2453.31 213.1,2666.1 213.4,2666.1 213.25,2666.1 862.53,2666.1 2842.86,2666.1 3055.47,2453.5 3055.4,197.1 2858.55,0.25
VCC3V3 on Layer 1 "VCC3V3_L02_P012" (solid, pour order 12): 2046,2275 1609,2275 1572,2238 1572,2199 1496,2123 1265,2123 1165,2223 1165,2467 1265,2567 1426,2567 1499,2494 1553,2494 1569,2510 1569,2535 1458,2646 1148,2646 1045,2543 1045,2192 1170,2067 1597,2067 1679,2149 1886,2149 2048,2149 2059,2160 2059,2262
VCC1V2-B on Layer 1 "VCC1V2-B_L02_P008" (solid, pour order 8): 678,1616 684,1610 684,1565 674,1555 574,1555 563,1544 563,1506 587,1482 587,1309 524,1246 132,1246 95,1283 95,1649 138,1692 368,1692 405,1655 405,1632 396,1623 219,1623 205,1609 205,1329 227,1307 491,1307 530,1346 530,1580 564.56,1616
VCC1V2-C on Layer 1 "VCC1V2-C_L02_P010" (solid, pour order 10): 673,1047 679,1041 679,997 670,988 574,988 566,980 566,938 604,900 604,738 540,674 129,674 89,714 89,1057.06 123.94,1092 393,1092 403,1082 403,1067 381,1045 215,1045 192,1022 192,789 236,745 499,745 530,776 530,1022 555,1047
VCC3V3-D on Layer 1 "VCC3V3-D_L02_P024" (solid, pour order 24): 506,489 539,456 539,230.47 496.53,188 253.24,188 217.57,223.66 217.57,434.26 272.32,489
VCC3V3-C on Layer 1 "VCC3V3-C_L02_P023" (solid, pour order 23): 530,1010 530,776 499,745 236,745 192,789 192,1022 210,1040 500,1040
VCC3V3-B on Layer 1 "VCC3V3-B_L02_P022" (solid, pour order 22): 487,1614 530,1571 530,1346 491,1307 227,1307 205,1329 205,1596 223,1614
VCC3V3-A on Layer 1 "VCC3V3-A_L02_P021" (solid, pour order 21): 505,2191 528,2168 528,1918 495,1885 231,1885 207,1909 207,2179 219,2191
VCC1V2-D on Layer 1 "VCC1V2-D_L02_P004" (solid, pour order 4): 384,590 418,556 418,503 412,497 280.32,497 217.57,434.26 217.57,223.66 253.24,188 496.53,188 539,230.47 539,456 589,506 675,506 685,496 685,438 675,428 580,428 573,421 573,390 601,362 601,180 548,127 161,127 86,202 86,521 155,590
VCC1V2-A on Layer 1 "VCC1V2-A_L02_P006" (solid, pour order 6): 671,2194 676,2189 676,2133 669.14,2126.14 568.99,2126.14 562,2119.15 562,2078 586,2054 586,1890 521,1825 112,1825 88,1849 88,2234 122,2268 367,2268 401,2234 401,2210.15 401,2205 397,2201 229,2201 207,2179 207,1909 231,1885 495,1885 528,1918 528,2175 547,2194
VCC12V on Layer 1 "VCC12V_L02_P000" (solid, pour order 0): 2797,160 2777,140 2777,17 2794,0 2856,0 3059,203 3059,2050 3043,2066 2901,2066 2881,2046 2881,1808 2881,1581 2881,940 2881,185 2856,160
VCC1V0 on Layer 1 "VCC1V0_L02_P011" (solid, remove dead copper, pour order 11): 2060,2481 2060,2395 2042,2377 1674,2377 1645,2348 1645,2311 1588,2254 1572,2238 1572,2199 1496,2123 1265,2123 1165,2223 1165,2467 1265,2567 1426,2567 1499,2494 2047,2494
VCC5V-A on Bottom Layer "VCC5V-A_L04_P020" (solid, pour order 20): 1948,378 1962,364 1962,264 1982,244 2043,244 2102,185 1437,185 1393,229 1393,356 1415,378
VCC12V on Bottom Layer "VCC12V_L04_P019" (solid, pour order 19): 2321,377 2346,352 2346,205 2326,185 2113,185 2048,250 1981,250 1971,260 1971,366 1982,377
VCC5V-A on Bottom Layer "VCC5V-A_L04_P018" (solid, pour order 18): 1948,1040 1962,1026 1962,926 1982,906 2043,906 2102,847 1437,847 1393,891 1393,1018 1415,1040
VCC12V on Bottom Layer "VCC12V_L04_P017" (solid, pour order 17): 2321,1039 2346,1014 2346,867 2326,847 2113,847 2048,912 1981,912 1971,922 1971,1028 1982,1039
VCC5V-B on Bottom Layer "VCC5V-B_L04_P016" (solid, pour order 16): 1948,1704 1962,1690 1962,1590 1982,1570 2043,1570 2102,1511 1437,1511 1393,1555 1393,1682 1415,1704
VCC12V on Bottom Layer "VCC12V_L04_P015" (solid, pour order 15): 2321,1703 2346,1678 2346,1531 2326,1511 2113,1511 2048,1576 1981,1576 1971,1586 1971,1692 1982,1703
GND on Layer 2 "GND_L03_P002" (solid, pour order 2): 197.1,0.25 0.25,197.1 0.31,2453.5 197.16,2650.35 2858.62,2650.35 3055.47,2453.5 3055.4,197.1 2858.55,0.25

## Keep-outs
Keep-Out Layer:
  lines w0.5: 0.25,197.1 0.33,2453.32 213.28,2666.12 2842.89,2666.12 3055.49,2453.52 3055.41,197.1 2858.56,0.25 197.1,0.25 0.25,197.1 ; 876.55,417.38 876.63,632.45 908.12,662.57 2503.28,662.57 2534.78,631.08 2534.7,417.65 2503.2,386.16 908.05,386.16 876.55,417.38 ; 876.55,1079.97 908.05,1048.48 2503.2,1048.75 2534.7,1080.25 2534.78,1293.68 2503.28,1325.17 908.12,1325.17 876.63,1295.05 876.55,1079.97 ; 880.88,1746.79 912.38,1715.57 2507.53,1715.57 2539.03,1746.79 2539.07,1960.53 2507.57,1992.02 912.45,1992.02 880.96,1961.86 880.88,1746.79

## Other copper
Top Layer:
  region net VCC1V2-A: 713.54,2273 718.54,2268 718.54,2123.54 713,2118 640,2118 635.54,2122.46 635.54,2159 664.54,2188 664.54,2209 680.54,2225 680.54,2268 685.54,2273
  region net VCC1V2-B: 714.59,1698 719.59,1693 719.59,1548.54 714.05,1543 641.05,1543 636.59,1547.46 636.59,1584 665.59,1613 665.59,1634 681.59,1650 681.59,1693 686.59,1698
  region net VCC1V2-D: 721.54,573 726.54,568 726.54,423.54 721,418 648,418 643.54,422.46 643.54,459 672.54,488 672.54,509 688.54,525 688.54,568 693.54,573
  region net VCC1V2-C: 717.54,1133 722.54,1128 722.54,983.54 717,978 644,978 639.54,982.46 639.54,1019 668.54,1048 668.54,1069 684.54,1085 684.54,1128 689.54,1133
  region net VCC5V-A: 2063,339 2069,333 2069,204 2058,193 1940,193 1931,202 1931,333 1937,339
  region net GND: 668,2273 674,2267 674,2230 656,2212 656,2190 646,2180 628,2162 628,2141 624,2137 595,2137 591,2141 591,2267 597,2273
  region net GND: 670,1696 676,1690 676,1653 658,1635 658,1613 648,1603 630,1585 630,1564 626,1560 597,1560 593,1564 593,1690 599,1696
  region net GND: 672.54,1133 678.54,1127 678.54,1090 660.54,1072 660.54,1050 650.54,1040 632.54,1022 632.54,1001 628.54,997 599.54,997 595.54,1001 595.54,1127 601.54,1133
  region net GND: 677,567 682,562 682,531 664,513 664,491 654,481 636,463 636,442 632,438 603,438 599,442 599,559 607,567
  region net VCC5V-B: 1997,2350 2017,2330 2061,2330 2069,2322 2069,2211 2060,2202 1939,2202 1927,2214 1927,2342 1935,2350
  region net VCC12V: 2361,2349 2369,2341 2369,2208 2363,2202 2240,2202 2233,2209 2233,2324 2239,2330 2274,2330 2289,2345 2293,2349
  region net VCC12V: 2363,339 2369,333 2369,204 2358,193 2240,193 2231,202 2231,333 2237,339
  region net VCC12V: 2363,1001.32 2369,995.32 2369,866.32 2358,855.32 2240,855.32 2231,864.32 2231,995.32 2237,1001.32
  region net VCC12V: 2363,1663.92 2369,1657.92 2369,1528.92 2358,1517.92 2240,1517.92 2231,1526.92 2231,1657.92 2237,1663.92
  region net VCC5V-B: 2063,1663.92 2069,1657.92 2069,1528.92 2058,1517.92 1940,1517.92 1931,1526.92 1931,1657.92 1937,1663.92
  region net VCC5V-A: 2063,1001.32 2069,995.32 2069,866.32 2058,855.32 1940,855.32 1931,864.32 1931,995.32 1937,1001.32
Bottom Layer:
  region net VIN: 2962,2163 2958,2159 2772,2159 2769,2162 2708,2162 2655,2215 2655,2385 2672,2402 2950,2402 2962,2390
  region net GND: 3021.06,679.36 3030.06,670.36 3030.06,640.36 3023.06,633.36 2915.06,633.35 2877.06,595.36 2791.06,595.36 2785.06,601.36 2785.06,669.36 2795.06,679.36
  region net GND: 2182,2358.69 2178.31,2355 2155,2355 2152,2358 2152,2379 2143,2388 2063,2388 2051,2376 2051,2273 2045,2267 2004,2267 1997,2274 1997,2357 1987,2367 1982,2372 1982,2410 1993,2421 2170,2421 2182,2409
  region net GND: 2783.06,1091.36 2787.06,1087.36 2787.06,991.36 2783.06,987.36 2733.06,987.36 2728.06,992.36 2728.06,1085.36 2734.06,1091.36
  region net GND: 2923.06,993.35 2926.06,990.36 2954.06,990.36 2957.06,993.35 2957.06,1129.36 2945.06,1141.36 2820.06,1141.36 2815.06,1136.36 2815.06,1105.36 2820.06,1100.36 2913.06,1100.36 2923.06,1090.36
  region net GND: 3021,1340 3030,1331 3030,1301 3023,1294 2915,1294 2877,1256 2791,1256 2785,1262 2785,1330 2795,1340
  region net GND: 2783,1752 2787,1748 2787,1652 2783,1648 2733,1648 2728,1653 2728,1746 2734,1752
  region net GND: 2923,1654 2926,1651 2954,1651 2957,1654 2957,1790 2945,1802 2820,1802 2815,1797 2815,1766 2820,1761 2913,1761 2923,1751
  region net VCC12V: 2910,1756 2919,1747 2919,1613 2909,1603 2870.02,1603 2843.34,1576.32 2812.68,1576.32 2807,1582 2807,1598 2807,1746 2817,1756
  region net VCC12V: 2910,1095 2919,1086 2919,952 2909,942 2870.02,942 2843.34,915.32 2812.68,915.32 2807,921 2807,937 2807,1085 2817,1095
  region net VCC5V-A: 3029.06,820.36 3041.06,808.36 3041.06,704.36 3029.06,692.36 2758.06,692.36 2752.06,698.36 2752.06,737.35 2759.06,744.35 2850.06,744.36 2861.06,755.36 2861.06,809.36 2872.06,820.36
  region net VCC5V-B: 3029,1481 3041,1469 3041,1365 3029,1353 2758,1353 2752,1359 2752,1398 2759,1405 2850,1405 2861,1416 2861,1470 2872,1481
  region net NetC101_1: 3025,935 3032,928 3032,880 3024,872 2876,872 2851.2,896.8 2811.61,896.8 2810,898.41 2810,908.48 2811.4,909.87 2846.87,909.87 2872,935
  region net NetC112_1: 3025,1596 3032,1589 3032,1541 3024,1533 2876,1533 2851.2,1557.8 2811.61,1557.8 2810,1559.41 2810,1569.48 2811.4,1570.87 2846.87,1570.87 2872,1596
  region net VCC12V: 2998,2136 3010,2124 3010,2099 3010,2011 2993,1994 2880,1994 2864,2010 2864,2123.69 2876.31,2136
  region net VCC1V0: 2129,2438 2136,2445 2136,2593 2131,2598 2076,2598 2070,2592 2070,2552 2062,2544 1957,2544 1951,2538 1951,2444 1957,2438
  region net NetL8_2: 2205.7,2284.3 2203.32,2286.68 2189.1,2286.68 2186.3,2283.88 2186.3,2046.7 2189,2044 2257,2044 2260,2047 2260,2228 2253,2235 2214.17,2235 2205.7,2243.47
  region net NetL7_2: 2205.7,2357.7 2203.32,2355.32 2189.1,2355.32 2186.3,2358.12 2186.3,2595.3 2189,2598 2257,2598 2260,2595 2260,2414 2253,2407 2214.17,2407 2205.7,2398.53
  region net VBUS: 2231,2398 2233.23,2395.77 2233.23,2314.23 2220,2301 2163,2301 2151,2289 2151,2274 2144,2267 2063,2267 2057,2273 2057,2373.58 2067.42,2384 2140,2384 2148,2376 2148,2355 2160,2343 2204,2343 2211.8,2350.8 2211.8,2395.66 2214.14,2398
  region net VCC3V3: 2129,2204 2136,2197 2136,2049 2131,2044 2076,2044 2070,2050 2070,2090 2057.77,2102.23 1957.77,2102.23 1951,2109 1951,2198 1957,2204

## Silkscreen, mask and mechanical layers (free items; w line width, h text height)
Top Overlay:
  text "misaka10039" at 1803,2550 h60
  text "Ver0.2" at 2114,2413 h60
Bottom Overlay:
  drawing of 25 lines, arcs and shapes, not listed
  text "USB3.0 Gen2/10Gpbs" at 1230,257.99 h60
  text "Changeo Tec" at 1247,76.32 h100
Mechanical 1:
  lines w0.5: 0.25,197.1 197.1,0.25 2858.56,0.25 3055.41,197.1 3055.49,2453.52 2842.89,2666.12 213.28,2666.12 0.33,2453.32 0.25,197.1 ; 876.55,417.38 908.05,386.16 2503.2,386.16 2534.7,417.65 2534.78,631.08 2503.28,662.57 908.12,662.57 876.63,632.45 876.55,417.38 ; 876.55,1079.97 876.63,1295.05 908.12,1325.17 2503.28,1325.17 2534.78,1293.68 2534.7,1080.25 2503.2,1048.75 908.05,1048.48 876.55,1079.97 ; 880.88,1746.79 880.96,1961.86 912.45,1992.02 2507.57,1992.02 2539.07,1960.53 2539.03,1746.79 2507.53,1715.57 912.38,1715.57 880.88,1746.79